# Altium PCB PWMBoard.PcbDoc
Units mil, origin at the board's own origin, x right, y up, seen from the top; angles counter-clockwise.
Board outline 2465 x 1565 mil, 2 copper layers (Top Layer, Bottom Layer); 33 components, 41 nets, 167 pads, 67 vias.
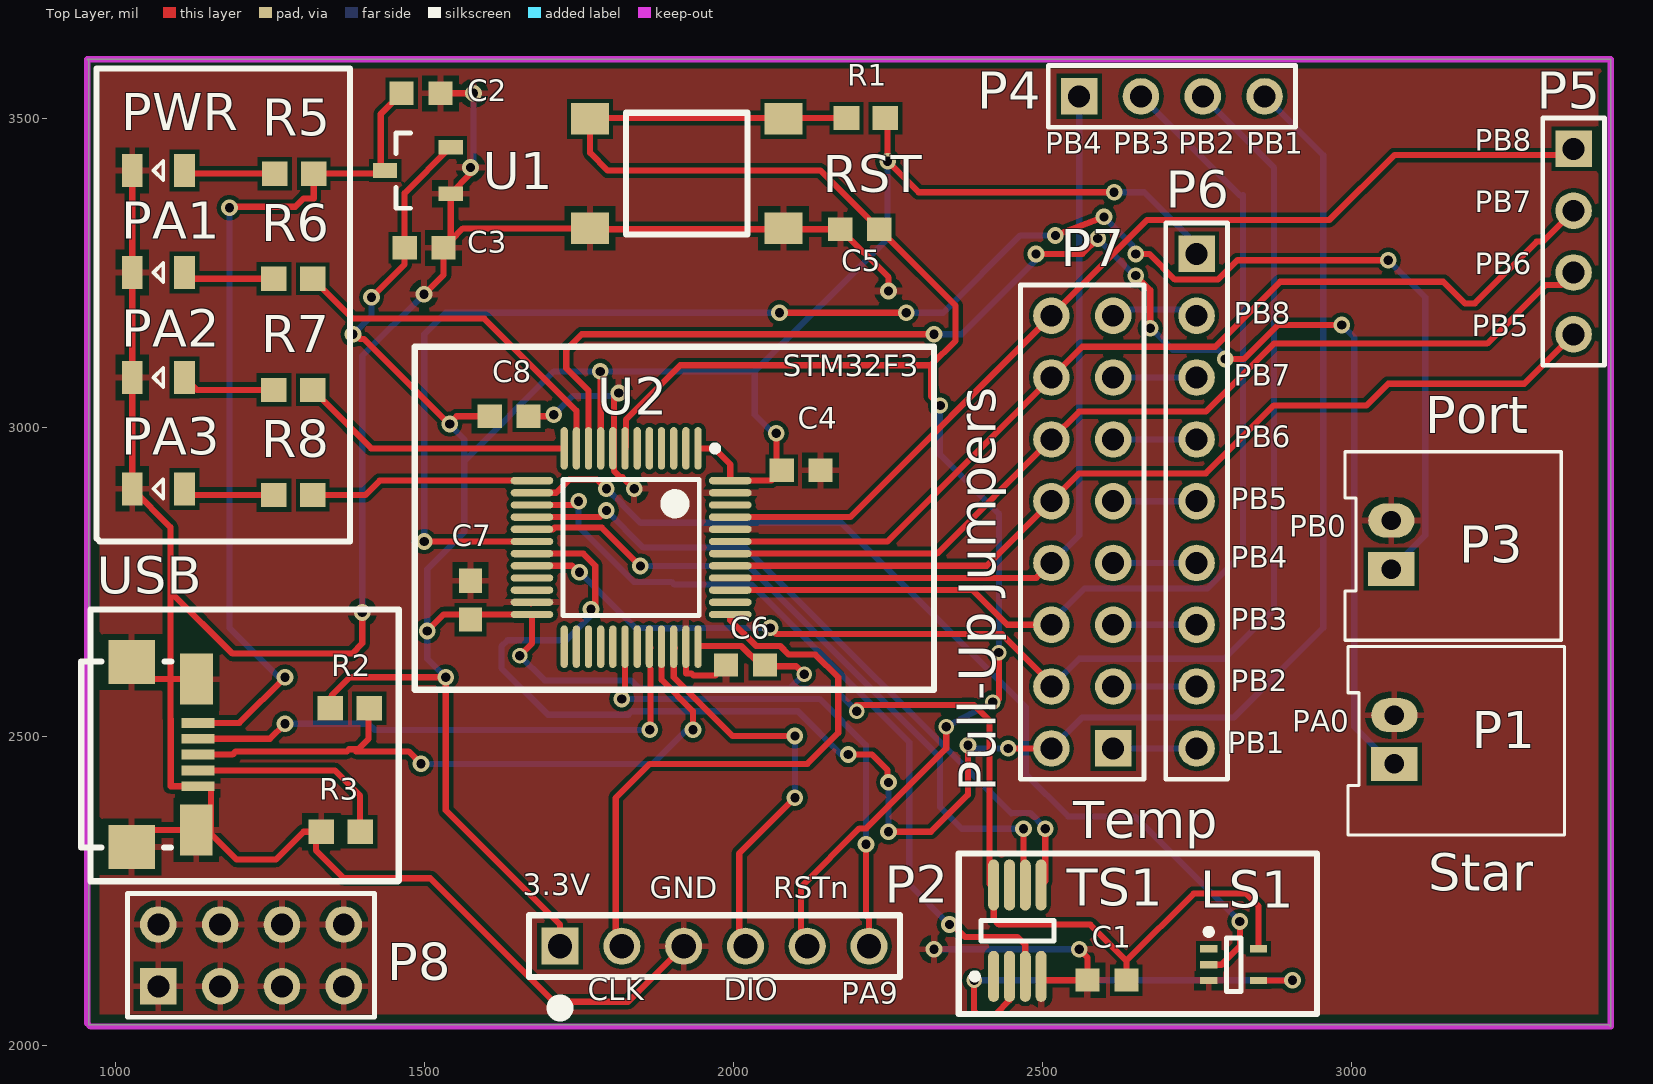
[diagram p0: Top Layer view]
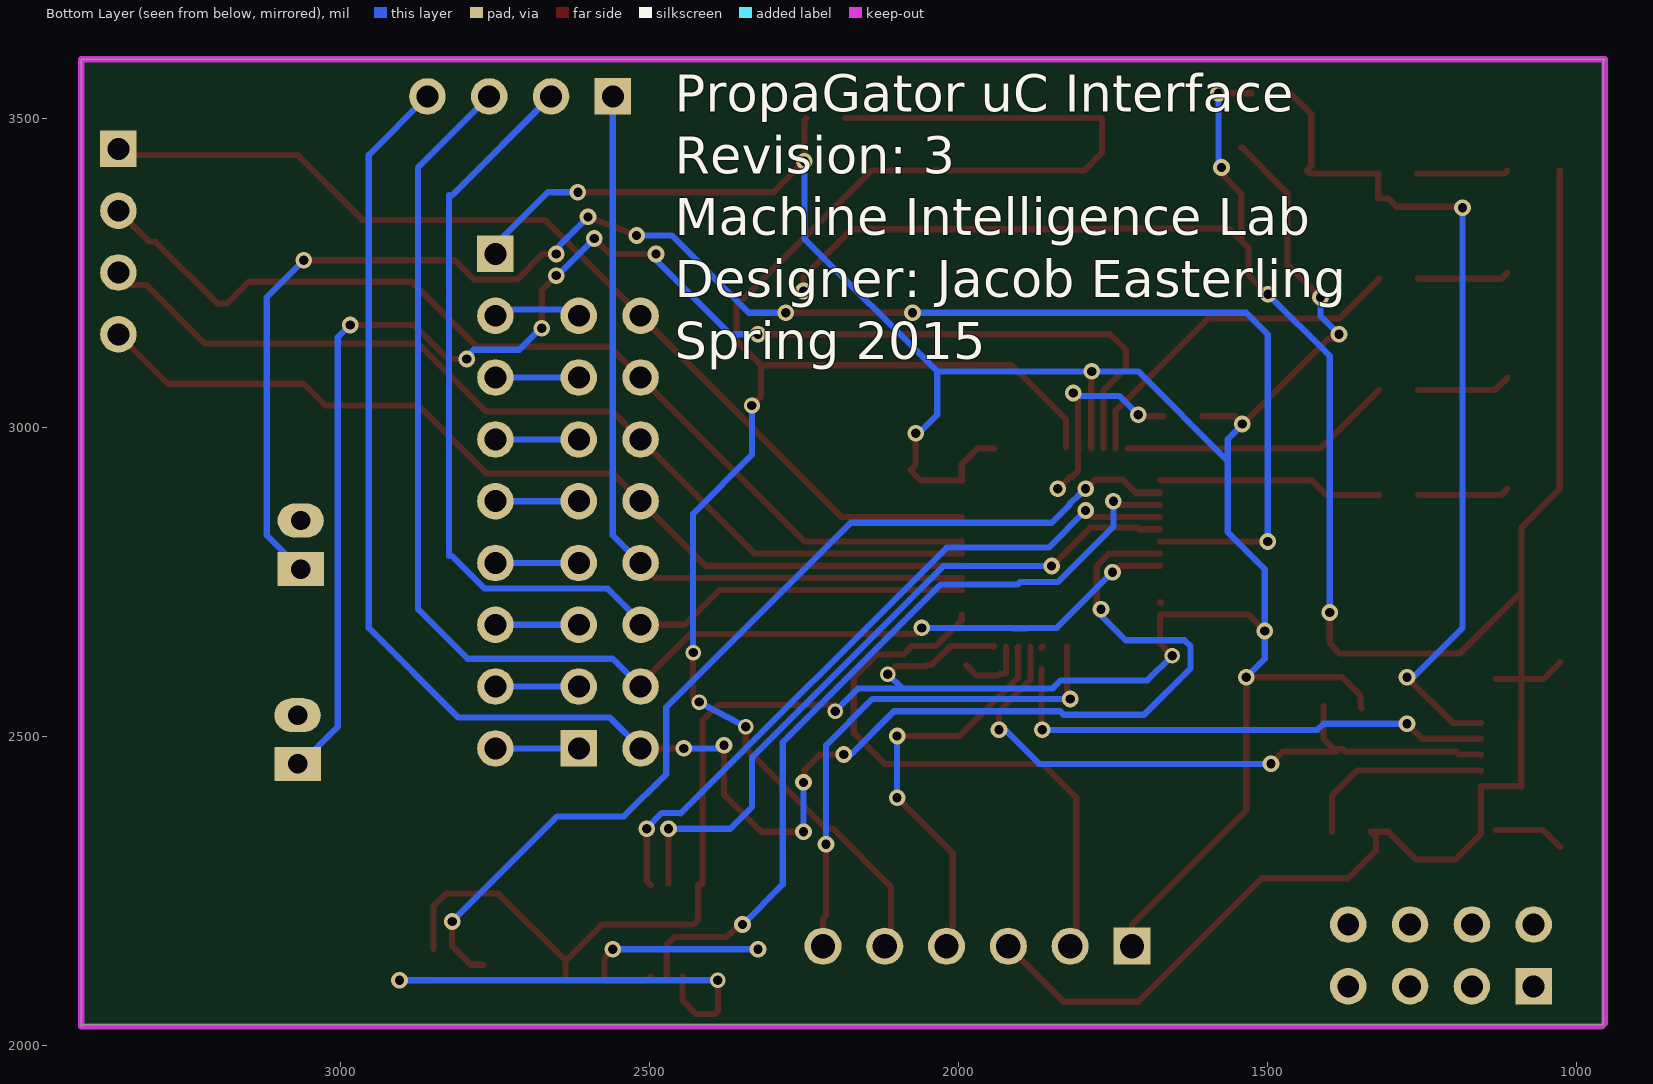
[diagram p1: Bottom Layer view, seen from below]

## Layer stack, top to bottom
Top Layer: signal copper 1.4
Dielectric: dielectric 12.6, FR-4, Dk 4.8
Bottom Layer: signal copper 1.4

## Board outline
955,3595 3420,3595 3420,2030 3417.5,2032.5 957.5,2032.5 957.5,3592.5 955,3595

## Design rules (kind name [scope] priority, off if disabled: settings)
Clearance [All] p1: gap=7
DiffPairsRouting [All] p1: maxlimit=10 minlimit=10 mostfreqgap=10 maxuncoupledlength=500
PolygonConnect [All] p1: connectstyle=Relief reliefconductorwidth=10 reliefentries=4 polygonreliefangle="90 Angle" airgapwidth=10
RoutingCorners [All] p1: cornerstyle=Round minsetback=100 maxsetback=100
RoutingVias [All] p1: holewidth=15 width=15 viastyle="Through Hole" minholewidth=15 minwidth=25 maxholewidth=20 maxwidth=30
SolderMaskExpansion [All] p1: expansion=4
Width [All] p1: maxlimit=100 minlimit=6 preferedwidth=6
26 further rules are at their usual default settings.

## Classes and differential pairs
differential pair USB: +USB_P -USB_N

## Components (designator, comment, footprint, x,y, rotation, side; value= is the part's Value field where it differs from the comment)
C1 "Cap" CAPC0603 2605,2105 r180 top
C2 "Cap" CAPC0603 1495,3540 r0 top
C3 "Cap" CAPC0603 1500,3290 r0 top
C4 "Cap" CAPC0603 2110,2930 r0 top
C5 "Cap" CAPC0603 2205,3320 r180 top
C6 "Cap" CAPC0603 2020,2615 r0 top
C7 "Cap" CAPC0603 1575,2720 r90 top
C8 "Cap" CAPC0603 1637.5,3017.5 r0 top
LS1 "M74VHC1GT04DFT1GOSCT-ND" SOT23127P600-8N 2810,2130 r0 top
P1 "2-pin Horz Sherlock" MOLEX-HDR-1X2-SHERLOCK-HORZ 3070,2455 r270 top
P2 "SWD" SWD_STM32 1720,2160 r90 top
P3 "2-pin Horz Sherlock" MOLEX-HDR-1X2-SHERLOCK-HORZ 3065,2770 r270 top
P4 "Header 4" HDR1X4 2560,3535 r0 top
P5 "Header 4" HDR1X4 3360,3450 r270 top
P6 "Header 9" HDR1X9 2750,3280 r270 top
P7 "Header 8X2" HDR2X8 2615,2480 r90 top
P8 "Header 4X2" HDR2X4 1070,2095 r0 top
PA1 "LED" LED0805 1070,3250 r180 top
PA2 "LED" LED0805 1070,3080 r180 top
PA3 "LED" LED0805 1070,2900 r180 top
PWR "LED" LED0805 1070,3415 r180 top (schematic designator USB)
R1 "Res" RES0603 2215,3500 r180 top
R2 "Res" RES0603 1380,2545 r0 top
R3 "Res" RES0603 1365,2345 r180 top
R5 "Res" RES0603 1290,3410 r0 top
R6 "Res" RES0603 1288.5,3240 r0 top
R7 "Res" RES0603 1288.5,3060 r0 top
R8 "Res" RES0603 1288.5,2890 r0 top
RST "Button" PTS645xxxxSMTR92 1925,3410 r180 top (schematic designator S1)
TS1 "TC72-3.3MUA-ND" "TC72 Temperature Sensor" 2460,2185 r90 top
U1 "MCP1703AT" MCP1703AT-xx02EDB 1490,3415 r180 top
U2 "STM32F3" STM32F072CB 1835,2805 r270 top
USB "USB Micro" 10118192-0001LF 1155,2470 r270 top

## Footprints (in the part's own frame and the unit in brackets; to place one, negate y for a bottom-side part, rotate by r counter-clockwise, add the part's x,y. Pads: shape width x height; smd on the part's side, far side on the other; paste and mask are expansions set on the pad)
10118192-0001LF [mm] "USB Micro-B Recepticle"
  rect 0.4x1.35 smd: 1(-1.3,-0.533) 2(-0.65,-0.533) 3(0,-0.533) 4(0.65,-0.533) 5(1.3,-0.533)
  rect 1.8x1.9 smd: SHD(-3.8,-3.248) SHD(3.8,-3.248)
  rect 2.1x1.35 smd: SHD(-3.1,-0.584) SHD(3.1,-0.598)
  silkscreen extent -3.83,-5.33 3.83,-1.63, body extent -3.96,-5.98 3.96,-0.32, height 3.09
CAPC0603 [mm] "Chip Capacitor, 2-Leads, Body 1.60x0.80mm, IPC Medium Density"
  rect 1x0.95 smd: 1(-0.8,0) 2(0.8,0)
  body extent -0.88,-0.48 0.87,0.48, height 0.8
HDR1X4 [mm] "Connector; Header; 4 Position"
  rect 1.5x1.5 hole 0.9: 1(0,0)
  round 1.5 hole 0.9: 2(2.54,0) 3(5.08,0) 4(7.62,0)
  silkscreen extent -1.27,-1.27 8.89,1.27
HDR1X9 [mm] "Connector; Header; 9 Position"
  rect 1.5x1.5 hole 0.9: 1(0,0)
  round 1.5 hole 0.9: 2(2.54,0) 3(5.08,0) 4(7.62,0) 5(10.16,0) 6(12.7,0) 7(15.24,0) 8(17.78,0) 9(20.32,0)
  silkscreen extent -1.27,-1.27 21.59,1.27
HDR2X4 [mm] "Connector; Header; 4x2 Position"
  rect 1.5x1.5 hole 0.9: 1(0,0)
  round 1.5 hole 0.9: 2(0,2.54) 3(2.54,0) 4(2.54,2.54) 5(5.08,0) 6(5.08,2.54) 7(7.62,0) 8(7.62,2.54)
  silkscreen extent -1.27,-1.27 8.89,3.81
HDR2X8 [mm] "Connector; Header; 8x2 Position"
  rect 1.5x1.5 hole 0.9: 1(0,0)
  round 1.5 hole 0.9: 2(0,2.54) 3(2.54,0) 4(2.54,2.54) 5(5.08,0) 6(5.08,2.54) 7(7.62,0) 8(7.62,2.54) 9(10.16,0) 10(10.16,2.54) 11(12.7,0) 12(12.7,2.54) 13(15.24,0) 14(15.24,2.54) 15(17.78,0) 16(17.78,2.54)
  silkscreen extent -1.27,-1.27 19.05,3.81
LED0805 [mm] "Chip LED, 2-Leads, Body 2.00x1.25mm, IPC Medium Density"
  rect 0.85x1.35 smd: A(-1.075,0) C(1.075,0)
  silkscreen extent -0.2,-0.4 0.2,0.4, body extent -1,-0.63 1,0.63, height 0.75
MCP1703AT-xx02EDB [mm] "SOT23, 3-Leads, Body 2.90x2.55mm, Pitch 0.95mm, IPC Medium Density"
  rect 1x0.6 smd: 1(-1.35,0.95) 2(-1.35,-0.95) 3(1.35,0)
  silkscreen extent 0.3,-1.55 0.9,1.55, body extent -0.9,-1.55 0.9,1.55, height 1.45
MOLEX-HDR-1X2-SHERLOCK-HORZ [mm]
  rect 1.397x1.905 hole 0.8: 1(0,0)
  oval 1.397x1.905 hole 0.8: 2(-2,0)
  silkscreen extent -4.83,-1.91 2.92,6.98, body extent -4.83,-1.91 2.87,8.59, height 5.54
PTS645xxxxSMTR92 [mm] "PTS645 Series SMT 6 mm Tactile Switch"
  rect 1.555x1.3 smd: A(-3.975,2.25) A(3.975,2.25) B(-3.975,-2.25) B(3.975,-2.25)
  silkscreen extent -2.5,-2.5 2.5,2.5, body extent -3,-3 3,3, height 4.5
RES0603 [mm] "Chip Resistor, 2-Leads, Body 1.60x0.80mm, IPC Medium Density"
  rect 1.05x1 smd: 1(-0.8,0) 2(0.8,0)
  body extent -0.88,-0.48 0.87,0.47, height 0.8
SOT23127P600-8N [mm] "Logic Level Shifter"
  rect 0.7x0.3 smd: 1(-1.025,0.65) 2(-1.025,0) 3(-1.025,-0.65) 4(1.025,-0.65) 5(1.025,0.65)
  silkscreen extent -1.15,-1.1 0.3,1.47, body extent -0.67,-1.1 0.67,1.1, height 1.1
STM32F072CB [mm] "TSQFP, 48-Leads, Body 7.00x7.00mm, Pitch 0.50mm, IPC Medium Density"
  oval 1.75x0.3 smd: 1(-4.075,2.75) 2(-4.075,2.25) 3(-4.075,1.75) 4(-4.075,1.25) 5(-4.075,0.75) 6(-4.075,0.25) 7(-4.075,-0.25) 8(-4.075,-0.75) 9(-4.075,-1.25) 10(-4.075,-1.75) 11(-4.075,-2.25) 12(-4.075,-2.75) 25(4.075,-2.75) 26(4.075,-2.25) 27(4.075,-1.75) 28(4.075,-1.25) 29(4.075,-0.75) 30(4.075,-0.25) 31(4.075,0.25) 32(4.075,0.75) 33(4.075,1.25) 34(4.075,1.75) 35(4.075,2.25) 36(4.075,2.75)
  oval 0.3x1.75 smd: 13(-2.75,-4.075) 14(-2.25,-4.075) 15(-1.75,-4.075) 16(-1.25,-4.075) 17(-0.75,-4.075) 18(-0.25,-4.075) 19(0.25,-4.075) 20(0.75,-4.075) 21(1.25,-4.075) 22(1.75,-4.075) 23(2.25,-4.075) 24(2.75,-4.075) 37(2.75,4.075) 38(2.25,4.075) 39(1.75,4.075) 40(1.25,4.075) 41(0.75,4.075) 42(0.25,4.075) 43(-0.25,4.075) 44(-0.75,4.075) 45(-1.25,4.075) 46(-1.75,4.075) 47(-2.25,4.075) 48(-2.75,4.075)
  silkscreen extent -4.2,-2.8 2.8,3.58, body extent -3.5,-3.5 3.5,3.5, height 1.6
SWD_STM32 [mil] "SWD connector matching the pinout on STM Discovery Boards"
  rect 60x60 hole 39.37: 1(0,0)
  round 60 hole 39.37: 2(0,-100) 3(0,-200) 4(0,-300) 5(0,-400) 6(0,-500)
  silkscreen extent -110,-550 50,50
"TC72 Temperature Sensor" [mm] "TSOP, 8-Leads, Body 3.00x3.00mm, Pitch 0.65mm, IPC Medium Density"
  oval 2.1x0.45 smd: 1(-1.875,0.975) 2(-1.875,0.325) 3(-1.875,-0.325) 4(-1.875,-0.975) 5(1.875,-0.975) 6(1.875,-0.325) 7(1.875,0.325) 8(1.875,0.975)
  silkscreen extent -2,-1.5 0.42,1.87, body extent -1.5,-1.5 1.5,1.5, height 1.1

## Part data
LS1: library part "Logic Level Shifter", "Logic Level Shifter"
P1 P3: library part MOLEX-HDR-1x2-SHERLOCK_RA, "Header, Molex, 2mm Pitch Sherlock Header, Single Row, Horizontal, 2 Circuits, Length 3.3mm,  0353630260"
P2: library part SWD_STM32, "SWD connector matching the pinout on STM Discovery Boards"
P4 P5: "Header, 4-Pin"
P6: "Header, 9-Pin"
P7: "Header, 8-Pin, Dual row"
P8: "Header, 4-Pin, Dual row"
RST: "SPST Button"
TS1: library part "TC72 Temperature Sensor", "SPI Termperature Sensor"
U1: "250 mA, 16V, Low Quiescent Current LDO Regulator"
U2: library part STM32F303CCT6, "IC MCU 32BIT 256KB FLASH 48LQFP"
USB: "USB Mini B Metal Shield SMT"

## Free pads (board coordinates)
  round 25 hole 15: 3(1655,2630)

## Via types
v1: diameter 27, hole 15, Top Layer to Bottom Layer, tented both sides, 60 vias
v2: diameter 25, hole 15, Top Layer to Bottom Layer, tented both sides, 6 vias
v3: diameter 26, hole 15, Top Layer to Bottom Layer, tented both sides, 1 vias

## Nets (pads, with @x,y where several pads share a name; then routed paths per layer and width w, separated by ;. In a path a pad name is that pad's centre, name@x,y a point inside that pad or via, vN(x,y) a via of type N, cw(c..) or ccw(c..) an arc to the next point about the centre after c; other vN are vias at no path point)
3.3V: C1.1 C3.1 C4.1 C6.2 C7.1 C8.1 LS1.5 P2.1 P6.1 pad.3 R1.1 R2.1 TS1.8 U1.2 U2.1 U2.9 U2.24 U2.36 U2.48 | length 6140.9
  Top Layer w10: R2.1 1350,2546.5 1350,2565 1380,2595 v1(1535,2595) 1535,2380 1720,2195 P2.1 ; v1(1385,3150) 1388.86,3150 1396.31,3142.56 1402.44,3142.56 1540,3005 1552.5,3017.5 C8.1 ; v1(1415,3210) 1468.5,3263.5 C3.1 1468.5,3378.5 1542.4,3452.4 U1.2 ; v1(1505,2670) 1531.73,2696.73 U2.24 1674.57,2649.57 pad.3 ; U2.9 v1@1785.79,3089.21 ; U2.36 1944.4,2645.7 2013.16,2645.7 2043.86,2615 C6.2 2053.5,2613 2102,2613 v2(2115,2600) ; U2.1 1969.57,2965.43 1995.43,2939.57 U2.48 2061.77,2913.27 C4.1 2070,2938.5 v1(2070,2990) ; v2@2199.65,2550 2370,2550 ; R1.1 2250,3496.5 v1(2250,3430) 2300,3380 v1(2616.5,3380) ; 2370.41,2550 2390,2550 2415,2525 TS1.8@2415,2260.43 ; TS1.8 2421.61,2203.39 2430,2195 2577.99,2195 2636.5,2136.5 ; C1.1 2636.5,2136.5 ; LS1.5 2850.35,2224.65 2830,2245 2745,2245 2636.5,2136.5
  Bottom Layer w10: v1(1385,3150) 1415,3180 v1(1415,3210) ; v1(1535,2595) 1505,2625 v1(1505,2670) 1505,2770 1565,2830 1565,2945 ; v1@1540,3005 1565,2980 1565,2945 ; pad.3 1695,2590 1835,2590 1848,2577 2092,2577 ; v1@2065,2990 2035,3020 2035,3090 ; v2(2115,2600) 2092,2577 ; v2(2200,2540) 2163,2577 2092,2577 ; v1(2250,3430) 2250,3305 2035,3090 ; v1@2615,3380 v1(2616.5,3380) 2665,3380 2750,3295 P6.1 ; 1565,2945 1710,3090 v1(1785,3090) 2035,3090
  other v1: 1541.5,3005
5V: C2.1 R5.2 U1.3 USB.1 | length 1393.4
  Top Layer w10: USB.1@1155,2521.18 1201.18,2521.18 v1(1275,2595) ; v1@1186.5,3356.5 1291.5,3356.5 1305,3370 1321.5,3370 R5.2 1431.85,3410 U1.3 1430,3421.85 1430,3506.5 C2.1
  Bottom Layer w10: v1(1185,3355) 1185,2675 1265,2595 v1(1275,2595)
CE: LS1.4 TS1.2 | length 727.3
  Top Layer w10: v2(2390,2105) 2390,2055 2395,2050 2425,2050 2447.2,2072.2 TS1.2 ; LS1.4 2904.41,2104.41 v1(2905,2105)
  Bottom Layer w10: v2(2390,2105) v1(2905,2105)
GND: C1.2 C2.2 C3.2 C4.2 C5.2 C6.1 C7.2 C8.2 LS1.3 P1.2 P2.3 P3.2 P8.1 P8.2 P8.3 P8.4 P8.5 P8.6 P8.7 P8.8 PA1.C PA2.C PA3.C PWR.C R3.2 RST.A TS1.4 U1.1 U2.8 U2.23 U2.35 U2.44 U2.47 USB.5 USB.SHD | length 5341.5
  Top Layer w10: USB.SHD@1027.11,2320.39 1054.67,2347.95 USB.SHD@1131.44,2347.95 ; USB.SHD@1027.11,2619.61 1054.67,2592.05 1089.61,2592.05 ; PWR.C PA1.C PA2.C PA3.C 1089.61,2838.07 1089.61,2733.78 ; USB.SHD@1132,2592.05 1089.61,2592.05 ; v1(1400,2700) 1400,2650 1383.39,2633.39 1190,2633.39 1089.61,2733.78 ; v1(1500,3215) 1531.5,3246.5 C3.2 C3.2@1543.15,3301.65 ; C2.2 v1(1580,3540) ; v1(1575,3420) 1575,3409.45 U1.1 C3.2@1543.15,3301.65 ; C8.2 1707.5,3017.5 v1(1710,3020) ; U2.23@1673.15,2715 U2.23 ; v1@1810,3050 1807.25,3047.25 1807.25,2967.21 U2.8 1807.25,2963.65 1807.25,2929.47 1817.74,2918.99 1821.01,2918.99 v1(1840,2900) ; P2.3 1830,2070 1710,2070 1510,2270 1370,2270 1325,2315 1325,2336.5 R3.2 1305,2345 1260,2300 1196.61,2300 1155,2341.61 1155,2418.82 1090,2418.82 1090,2527.09 1089.61,2527.48 1089.61,2592.05 ; U2.35 1923.58,2601.42 1932.55,2601.42 1935.85,2598.12 1971.62,2598.12 C6.1 ; v1(2251.5,3220) 2251.5,3242.01 C5.2 1769.92,3320 1768.5,3321.42 1562.91,3321.42 C3.2@1543.15,3301.65 ; TS1.4 2504.57,2105 C1.2 2573.5,2141.5 v1(2560,2155) ; LS1.3 LS1.3@2770.59,2104.41 ; 1089.61,2592.05 1089.61,2733.78
  Bottom Layer w10: v1(1400,2700) 1400,3115 v1(1500,3215) ; v1@1580,3415 v1(1580,3540) ; v1(1710,3020) 1740,3050 v1@1810,3050 ; v1@2250,3218.5 v1(2251.5,3220) ; v1(2325,2155) v1(2560,2155)
  other v1: 1815,3055
INDICATOR1: R6.2 U2.11 | length 575.9
  Top Layer w10: R6.2 1384.5,3175.5 1597.34,3175.5 1746.42,3026.42 U2.11
INDICATOR2: R7.2 U2.12 | length 445.9
  Top Layer w10: R7.2 1414.57,2965.43 U2.12
INDICATOR3: R8.2 U2.13 | length 364.2
  Top Layer w10: R8.2 1405,2890 1428.27,2913.27 U2.13
NetP6_2: P6.2 P7.15 | length 135
  Bottom Layer w10: P7.15@2615,3190 P6.2@2750,3190
NetP6_3: P6.3 P7.13 | length 135
  Bottom Layer w10: P7.13 P6.3
NetP6_4: P6.4 P7.11 | length 135
  Bottom Layer w10: P7.11 P6.4
NetP6_5: P6.5 P7.9 | length 135
  Bottom Layer w10: P7.9 P6.5
NetP6_6: P6.6 P7.7 | length 135
  Bottom Layer w10: P7.7 P6.6
NetP6_7: P6.7 P7.5 | length 135
  Bottom Layer w10: P7.5 P6.7
NetP6_8: P6.8 P7.3 | length 135
  Bottom Layer w10: P7.3 P6.8
NetP6_9: P6.9 P7.1 | length 135
  Bottom Layer w10: P7.1 P6.9
NetPA1_A: PA1.A R6.1 | length 148.8
  Top Layer w10: PA1.A 1122.32,3240 R6.1
NetPA2_A: PA2.A R7.1 | length 153
  Top Layer w10: PA2.A 1132.32,3060 R7.1
NetPA3_A: PA3.A R8.1 | length 148.8
  Top Layer w10: PA3.A 1122.32,2890 R8.1
NetPWR_A: PWR.A R5.1 | length 148.3
  Top Layer w10: PWR.A 1117.32,3410 R5.1
NetR3_1: R3.1 USB.4 | length 316.9
  Top Layer w10: USB.4@1155,2444.41 1355.59,2444.41 1396.5,2403.5 R3.1
PA0: P1.1 U2.10 | length 2387.6
  Top Layer w10: U2.10 1766.1,3058.9 1730,3095 1730,3125 1755,3150 v1(2325,3150) ; v1(2490,3280) 2565,3280 v1(2590,3305) ; v1(2651.5,3245) 2675.02,3221.47 2675.02,3164.98 v1@2680,3160 ; v1(2796.5,3110) 2825.96,3110 2880.96,3165 v1(2985,3165)
  Bottom Layer w10: v1(2325,3150) 2370,3150 2490,3270 v1(2490,3280) ; v1(2590,3305) 2650,3245 v1(2651.5,3245) ; v1@2681.5,3155 2711.5,3125 2785,3125 v1@2795,3115 ; v1(2985,3165) 3005,3145 3005,2515 3065,2455 P1.1
  other v1: 2675,3160
PA8: U2.29
PA9: P2.6 U2.30 | length 839.8
  Top Layer w10: v1(1820,2560) 1825.16,2565.16 U2.30 ; v1(2215,2325) 2215,2210 2220,2205 P2.6
  Bottom Layer w10: v1(1820,2560) 2140,2560 2215,2485 v1(2215,2325)
PB0: P3.1 U2.18 | length 2747.3
  Top Layer w10: v1(1500.16,2814.84) U2.18 ; v1(2075,3185) v1(2280,3185) ; v1(2521.5,3310) v1(2600,3340) ; v1(2651.5,3280) 2673.47,3280 2715,3238.47 2784.5,3238.47 2816.03,3270 v1(3060,3270)
  Bottom Layer w10: v1(1500.16,2814.84) 1500.16,3149.84 ; 1500.32,3150 1535,3184.68 1535,3185 v1(2075,3185) ; v1(2280,3185) 2340,3185 2465,3310 v1@2520,3310 ; v1(2600,3340) 2646.5,3293.5 2646.5,3285 v1(2651.5,3280) ; v1(3060,3270) 3120,3210 3120,2825 P3.1
PB1: P4.4 P7.2 U2.19 | length 2981.7
  Top Layer w10: U2.19 1757.4,2795.16 1777,2775.56 1777,2712 v1(1770,2705) ; v1(2186.5,2470) 2225,2470 2250,2445 v1@2250,2425 ; v1(2251.5,2345) 2320,2345 2380,2405 v1(2380,2485) ; v1@2441.5,2480 v1(2445,2480) P7.2
  Bottom Layer w10: v1(1770,2705) 1770,2695 1730,2655 1635,2655 1625,2645 1625,2610 1700.5,2534.5 1830.56,2534.5 1836.06,2540 2105,2540 2175,2470 v1@2185,2470 ; v1@2251.5,2348.5 v1(2251.5,2425) ; v1(2380,2485) 2385,2480 v1(2445,2480) ; P7.2 2565,2530 2810,2530 2955,2675 2955,3440 P4.4
PB2: P4.3 P7.4 U2.20 | length 2212.5
  Top Layer w10: U2.20 1739.53,2775.47 v1@1750,2765 ; v1(2060,2675) 2070,2665 2434.65,2665 2515,2584.65 P7.4
  Bottom Layer w10: v1(1751.5,2765) 1841.5,2675 1890.43,2675 1890.93,2674.5 1912.06,2674.5 1912.56,2675 v1(2060,2675) ; P7.4 2560,2625 2795,2625 2875,2705 2875,3420 P4.3
PB3: P4.2 P7.6 U2.39 | length 1706.8
  Top Layer w10: U2.39 2387.59,2736.1 2443.69,2680 P7.6
  Bottom Layer w10: P7.6 2515,2685 2568.47,2738.47 2767.2,2738.47 2820,2791.27 ; P4.2 2820,3375 ; 2825,2791.27 2825,3375
PB4: P4.1 P7.8 U2.40 | length 1303.2
  Top Layer w10: U2.40 2490.79,2755.79 P7.8
  Bottom Layer w10: P7.8 2560,2825 P4.1
PB5: P5.4 P7.10 U2.41 | length 1519.7
  Top Layer w10: U2.41 2410.47,2775.47 P7.10 2560,2925 2765,2925 2875,3035 3025,3035 3060,3070 3280,3070 P5.4
PB6: P5.3 P7.12 U2.42 | length 1553
  Top Layer w10: U2.42 2330.16,2795.16 P7.12 2560,3025 2765,3025 2875,3135 3055,3135 3220,3135 3315,3230 3340,3230 P5.3
PB7: P5.2 P7.14 U2.43 | length 1615.2
  Top Layer w10: U2.43 2249.84,2814.84 P7.14 2565,3130 2780,3130 2885,3235 3149.04,3235 3184.04,3200 3200,3200 3300,3300 3310,3300 P5.2
PB8: P5.1 P7.16 U2.45 | length 1611.6
  Top Layer w10: U2.45 2189.57,2854.21 2515,3179.64 P7.16 2670,3335 2965,3335 3070,3440 3290,3440 3350,3440 P5.1
RSTN: C5.1 P2.5 R1.2 RST.B U2.7 | length 2997.6
  Top Layer w10: U2.7@1826.94,2967.21 1826.94,3012.29 1914.49,3099.84 2320.16,3099.84 ; P2.5 2110,2170 2110,2256.06 2204.44,2350.5 2215.5,2350.5 2345,2480 v2(2345,2515) ; R1.2 1769.92,3500 1768.5,3498.58 1768.5,3443.5 1797.01,3415 2141.5,3415 C5.1 2360,3196.5 2360,3139.68 2320.16,3099.84 ; v3(2335,3035) 2320.16,3049.84 2320.16,3099.84 ; v2(2420,2555) 2425,2560 2430,2560 v2(2430,2635)
  Bottom Layer w10: v3(2335,3035) 2335,2955 2430,2860 v2(2430,2635) ; v2(2345,2515) v2(2420,2555)
SPI1_MISO: TS1.5 U2.16 | length 1143.2
  Top Layer w10: U2.16 1784.21,2854.21 v1(1795,2865) ; TS1.5 2505,2265.43 v1(2505,2350)
  Bottom Layer w10: v1(1795,2865) 1855,2805 2020,2805 2450,2375 2450.5,2375.5 2480.56,2375.5 2505,2351.06 v1(2505,2350)
SPI1_MOSI: TS1.6 U2.17 | length 1133.6
  Top Layer w10: U2.17 1708.75,2834.53 1711.43,2837.21 1787.79,2837.21 v1(1850,2775) ; TS1.6@2470,2261.61 v1(2470,2350)
  Bottom Layer w10: v1(1850,2775) 2025,2775 2335,2465 2335,2385 2370,2350 v1(2470,2350)
SPI1_NSS: LS1.2 U2.14 | length 1617.2
  Top Layer w10: U2.14 1713.58,2893.58 1735,2915 1780,2915 v1(1795,2900) ; LS1.2 2790,2130 2820,2160 v1(2820,2200)
  Bottom Layer w10: v1(1795,2900) 1804.5,2890.5 1805.56,2890.5 1820.5,2875.56 1820.5,2874.5 1850,2845 2175,2845 2473.47,2546.53 2473.47,2438.47 2541.94,2370 2650,2370 v1(2820,2200)
SPI1_SCK: TS1.3 U2.15 | length 1307.9
  Top Layer w10: U2.15 1743.9,2873.9 v1(1750,2880) ; v1(2350,2195) 2355,2195 2375,2175 2460,2175 2472.8,2162.2 TS1.3
  Bottom Layer w10: v1(1750,2880) 1750,2838.94 1839.44,2749.5 1900.5,2749.5 1905,2745 2030,2745 2285,2490 2285,2260 v1(2350,2195)
SWCLK: P2.2 U2.37 | length 959.8
  Top Layer w10: P2.2 1810,2170 1810,2400 1865,2455 2120,2455 2170,2505 2170,2595 2133.27,2631.73 2090.12,2631.73 2076.15,2645.7 2037.2,2645.7 1995.43,2687.47 U2.37
SWDIO: P2.4 U2.34 | length 668.9
  Top Layer w10: U2.34@1905.68,2642.79 U2.34 1903.9,2595.14 1999.04,2500 v1(2100,2500) ; P2.4 2010,2170 2010,2310 v1(2100,2400)
  Bottom Layer w10: v1(2100,2400) v1(2100,2500)
USB_N: U2.32 USB.2 | length 825.9
  Top Layer w10: USB.2@1155,2495.59 1250.59,2495.59 v1(1275,2520) ; U2.32 U2.32@1866.31,2642.79 ; v1(1865,2510) 1866.31,2511.31 1866.31,2608.61
  Bottom Layer w10: v1(1275,2520) 1410,2520 1420,2510 v1(1865,2510)
USB_P: R2.2 U2.33 USB.3 | length 1045.6
  Top Layer w10: USB.3@1155,2470 1190,2470 1195,2475 1375,2475 ; 1378.5,2478.5 1393.5,2478.5 1410,2495 R2.2@1410,2548.5 ; 1390,2475 1475,2475 v1(1495,2455) ; U2.33 1884.21,2590.79 1935,2540 v1(1935,2510)
  Bottom Layer w10: v1(1495,2455) 1870,2455 1925,2510 v1(1935,2510)
pads on no net: LS1.1 TS1.1 TS1.7 U2.2 U2.3 U2.4 U2.5 U2.6 U2.21 U2.22 U2.25 U2.26 U2.27 U2.28 U2.31 U2.38 U2.46

## Polygon pours and split planes (outlines as drawn)
GND on Top Layer "GND" (solid, pour order 2): 975,3580 3410,3580 3400,3570 3400,2050 975,2050 975,3575

## Keep-outs
Keep-Out Layer:
  lines w10: 955,2035 955,3595 3420,3595 3420,2030 960,2030 955,2035

## Silkscreen, mask and mechanical layers (free items; w line width, h text height)
Top Overlay:
  lines w10: 960,2265 960,2705 1458.98,2705 1458.98,2266.02 1457.96,2265 960,2265 ; 970,2820 970,3580 1380,3580 1380,2815 975,2815 970,2820 ; 1485,2575 1485,3130 2325,3130 2325,2575 1485,2575 ; 2365,2050 2945,2050 2945,2310 2365,2310 2365,2050
  text "PB8" at 3200,3435 h60
  text "PB4" at 2505,3430 h60
  text "PB3" at 2615,3430 h60
  text "PB2" at 2720,3430 h60
  text "PB1" at 2830,3430 h60
  text "PB7" at 3200,3335 h60
  text "PB6" at 3200,3235 h60
  text "PB8" at 2810,3155 h60
  text "PB5" at 3195,3135 h60
  text "STM32F3" at 2080,3070 h60
  text "PB7" at 2810,3055 h60
  text "Port" at 3120,2990 h60
  text "PB6" at 2810,2955 h60
  text "PB5" at 2805,2855 h60
  text "PB0" at 2900,2810 h60
  text "PB4" at 2805,2760 h60
  text "PB3" at 2805,2660 h60
  text "PB2" at 2805,2560 h60
  text "PA0" at 2905,2495 h60
  text "PB1" at 2800,2460 h60
  text "Pull-Up Jumpers" at 2425,2410 h60 r90
  text "Temp" at 2550,2335 h60
  text "Star" at 3125,2250 h60
  text "3.3V" at 1660,2230 h60
  text "GND" at 1865,2225 h60
  text "RSTn" at 2065,2225 h60
  text "CLK" at 1765,2060 h60
  text "DIO" at 1985,2060 h60
  text "PA9" at 2175,2055 h60
Bottom Overlay:
  text "PropaGator uC Interface" at 2460,3510 h60
  text "Revision: 3" at 2460,3410 h60
  text "Machine Intelligence Lab" at 2460,3310 h60
  text "Designer: Jacob Easterling" at 2460,3210 h60
  text "Spring 2015" at 2460,3110 h60